# EAGLE board FLEX_DCDC (EAGLE 9.5.2)
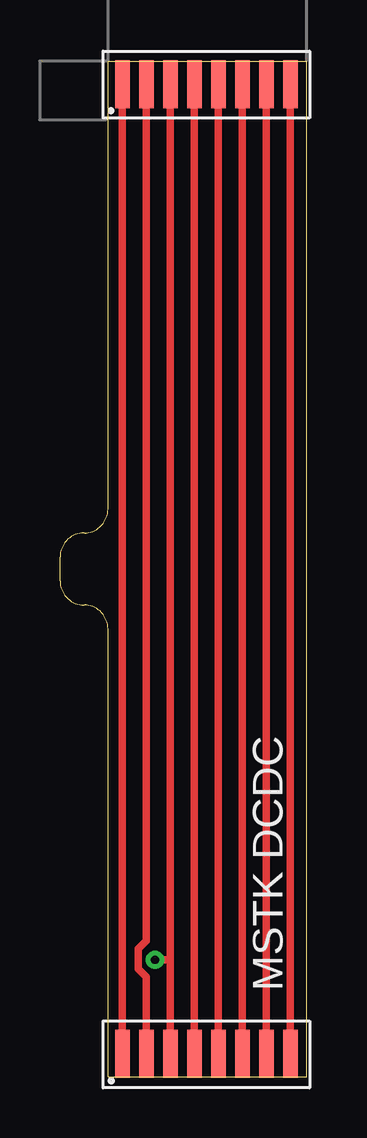
[diagram p0: board, top side]
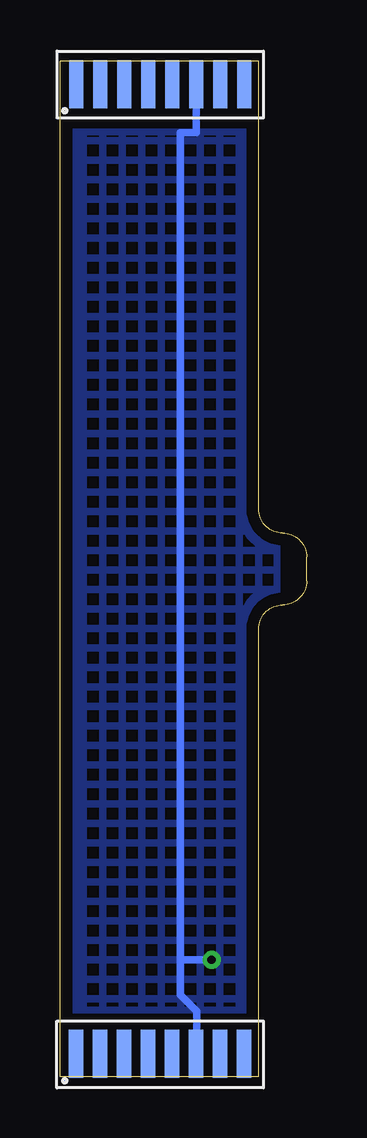
[diagram p1: board, bottom side, seen from below]

Size 10.28 x 42.34 mm. Coordinates in mm from the lower left corner, seen from the top.
Outline: 10.28,0 10.28,42.34 2,42.34 2,23.67 arc-90 1,22.67 arc90 0,21.67 0,20.67 arc90 1,19.67 arc-90 2,18.67 2,0 10.28,0
Copper layers (1*16): Top 0.035mm / dielectric 1.5mm / Bottom 0.035mm
Design rules "default *": minimum track width 6mil, minimum drill 0.35mm, track to track 6mil, track to pad 6mil, pad to pad 6mil, via to via 6mil, smd to smd 6mil, copper to edge 20mil, drill to drill 6mil, minimum pad ring 10mil, minimum via ring 8mil, stop-mask expansion 4mil, vias tented up to drill 0mil, thermal gap 10mil

## Footprints (pad centres in the part's own frame; a part is rotated, then mirrored left to right if it is on the bottom)
FLEX8 = smd 0.6 x 2: 1 -3.5,0.25; 2 -2.5,0.25; 3 -1.5,0.25; 4 -0.5,0.25; 5 0.5,0.25; 6 1.5,0.25; 7 2.5,0.25; 8 3.5,0.25

## Placement (x,y rotation side)
K1  FLEX8  [FLEX8]  6.1,41.14 0 top
K2  FLEX8  [FLEX8]  6.1,0.71 0 top
K3  FLEX8  [FLEX8]  6.1,41.14 0 bottom
K4  FLEX8  [FLEX8]  6.1,0.71 0 bottom

## Library data of the parts
K1-K4 = Flex

## Nets
GND: K1.3 K2.3 K3.6 K4.6
N$1: K1.1 K2.1
N$2: K1.2 K2.2
N$4: K1.4 K2.4
N$5: K1.5 K2.5
N$6: K1.6 K2.6
N$7: K1.7 K2.7
N$8: K1.8 K2.8

## Tracks (layer width: path | path; a pad name or v marks a point on that pad's centre or on a via)
GND  (via drill 0.35)
  Top 0.305: K4.6 4.6,4.6 | 4.6,4.6 K3.6 | v3.96,4.88 4.6,4.88 4.6,4.6
  Bottom 0.305: K4.6 4.58,0.98 4.58,2.73 5.26,3.42 5.26,4.88 | 5.26,4.88 5.26,39.36 4.6,39.36 K3.6 | v3.96,4.88 5.26,4.88
  pour Bottom (hatched): 1.24,2.79 11.65,2.79 11.65,39.37 1.24,39.37
N$1
  Top 0.305: K2.1 K1.1
N$2
  Top 0.305: K2.2 3.6,4.16 3.27,4.5 3.27,5.33 3.6,5.66 K1.2
N$4
  Top 0.305: K2.4 K1.4
N$5
  Top 0.305: K2.5 K1.5
N$6
  Top 0.305: K2.6 K1.6
N$7
  Top 0.305: K2.7 K1.7
N$8
  Top 0.305: K2.8 K1.8

## Text on the board
tNames: MSTK DCDC
Document: Stiffener TOP | Stiffener TOP
tDocu: Stiffener TOP